# Altium PCB project4_v1.PcbDoc
Units mm, origin at the board's own origin, x right, y up, seen from the top; angles counter-clockwise.
Board outline 84.4 x 31.9 mm, 2 copper layers (Top Layer, Bottom Layer), stack 1.671 mm thick; 30 components, 30 nets, 99 pads, 9 vias.
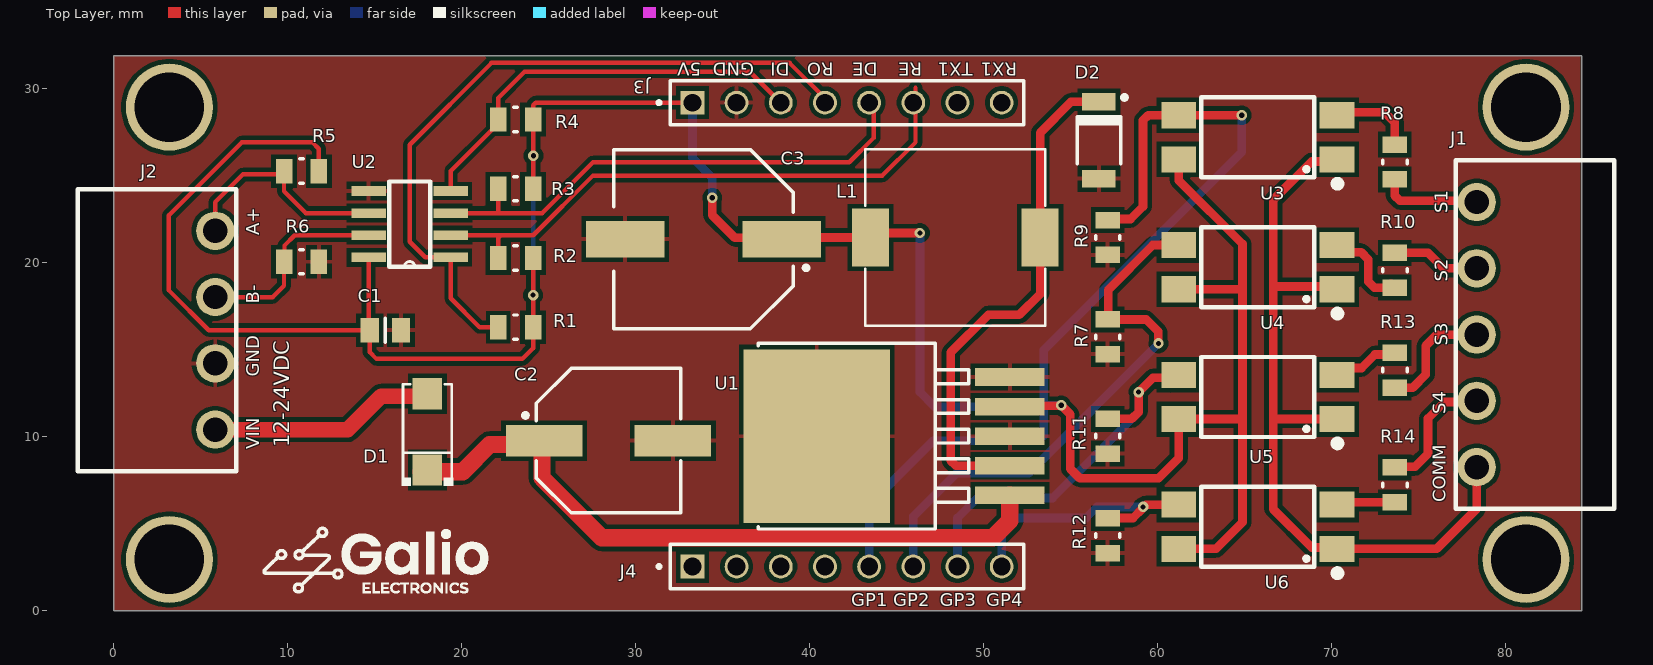
[diagram p0: Top Layer view]
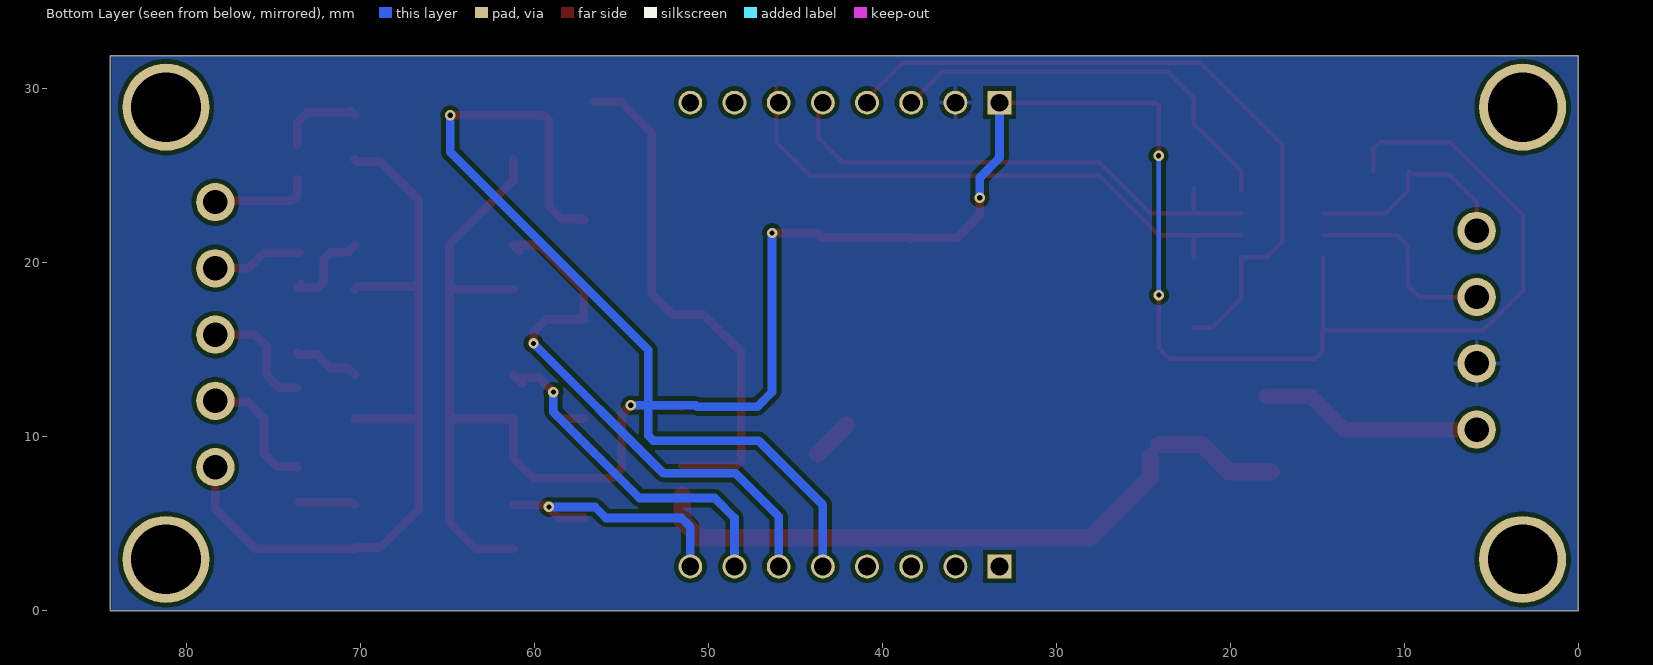
[diagram p1: Bottom Layer view, seen from below]
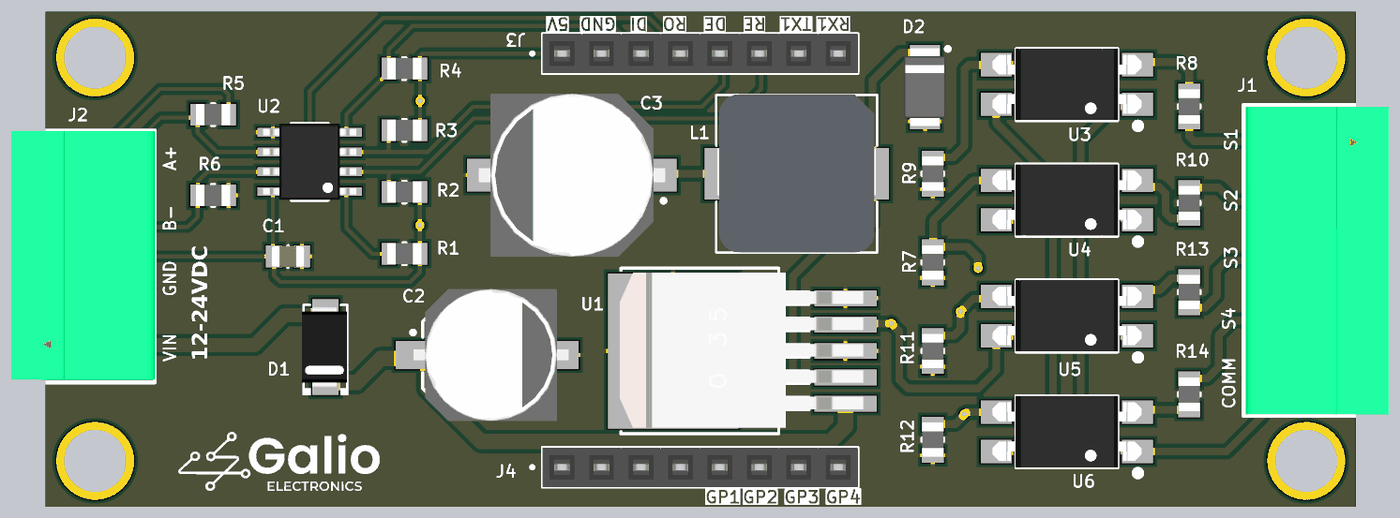
[diagram p2: 3D render of the assembled board from above, using the file's embedded part models]

## Layer stack, top to bottom
Top Solder: solder mask 0.0102, Solder Resist, Dk 3.5
Top Layer: signal copper 0.0356
Dielectric 1: dielectric 1.6, FR-4, Dk 4.8
Bottom Layer: signal copper 0.0356
Bottom Solder: solder mask 0.0102, Solder Resist, Dk 3.5

## Board outline
0,0 84.4,0 84.4,31.9 0,31.9

## Design rules (kind name [scope] priority, off if disabled: settings)
Clearance [All] p1: gap=0.254 ignorepadtopadclearanceinfootprint=FALSE
PolygonConnect [All] p1: connectstyle=Relief reliefconductorwidth=0.254 reliefentries=4 polygonreliefangle="90 Angle" airgapwidth=0.254
RoutingVias [All] p1: holewidth=0.711 width=1.27 viastyle="Through Hole" minholewidth=0.711 minwidth=1.27 maxholewidth=0.711 maxwidth=1.27
SolderMaskExpansion [All] p1: expansion=0.102 istentingtop=FALSE
Width Width_1 [InNet('VIN')] p1: maxlimit=1.2 minlimit=0.9 preferedwidth=1 minimp=50.000000 maximp=50.000000 favimp=50.000000
Width [All] p2: maxlimit=1 minlimit=0.254 preferedwidth=0.5 minimp=50.000000 maximp=50.000000 favimp=50.000000
30 further rules are at their usual default settings.

## Components (designator, comment, footprint, x,y, rotation, side; value= is the part's Value field where it differs from the comment)
C1 "100nF" CAPC2012X135N 15.621,16.129 r180 top
C2 "100uF" CAPAE830X1020N 28.448,9.779 r0 top
C3 "470uF" CAPAE1030X1020N 33.909,21.365 r180 top
D1 "1N4001" SMA_L4.5-W2.7-LS5.2-RD 18.034,10.287 r90 top
D2 "PMEG4020ETP,115" SODFL4725X110N 56.642,27.051 r270 top
J1 "TRT5" TRT_5_3.81_PLUG 78.366,15.875 r270 top
J2 "TRT4" TRT_4_3.81_PLUG 5.842,16.129 r90 top
J3 "PIN-HEADER-8" PIN-HEADER-8-FEMALE 42.164,29.21 r180 top
J4 "PIN-HEADER-8" PIN-HEADER-8-FEMALE 42.164,2.54 r180 top
L1 "CDRH104RNP-330NC" IND-SMD_L10.2-W10.0 48.387,21.463 r0 top
R1 "10k" RESC2012X60N 23.114,16.302 r0 top
R2 "10k" RESC2012X60N 23.114,20.281 r0 top
R3 "10k" RESC2012X60N 23.114,24.261 r0 top
R4 "10k" RESC2012X60N 23.114,28.24 r0 top
R5 "20k" RESC2012X60N 10.795,25.273 r0 top
R6 "20k" RESC2012X60N 10.795,20.066 r180 top
R7 "10k" RESC2012X60N 57.15,15.748 r90 top
R8 "4.7k" RESC2012X60N 73.66,25.797 r90 top value=10k
R9 "10k" RESC2012X60N 57.15,21.463 r90 top
R10 "4.7k" RESC2012X60N 73.66,19.574 r270 top value=10k
R11 "10k" RESC2012X60N 57.15,10.033 r90 top
R12 "10k" RESC2012X60N 57.15,4.318 r270 top
R13 "4.7k" RESC2012X60N 73.66,13.827 r90 top value=10k
R14 "4.7k" RESC2012X60N 73.66,7.239 r270 top value=10k
U1 "LM2575HVSX-5.0_NOPB" TO-263-5_L10.0-W8.4-P1.70-LS15.3-BR 45.974,10.033 r0 top
U2 "MAX485" SOIC8-N_MC 17.018,22.225 r180 top
U3 "PC814" PC814BS 65.786,27.216 r90 top
U4 "PC814" PC814BS 65.786,19.753 r90 top
U5 "PC814" PC814BS 65.786,12.289 r90 top
U6 "PC814" PC814BS 65.786,4.826 r90 top

## Footprints (in the part's own frame and the unit in brackets; to place one, negate y for a bottom-side part, rotate by r counter-clockwise, add the part's x,y. Pads: shape width x height; smd on the part's side, far side on the other; paste and mask are expansions set on the pad)
CAPAE830X1020N [mm] "Capacitor, Aluminium Electrolytric, 8.3mm L X 8.3mm W X 10.2mm H, IPC Medium Density"
  rect 4.4x1.8 smd: 1(-3.7,0) 2(3.7,0)
  silkscreen extent -4.9,-4.15 4.15,4.15, body extent -4.75,-4.25 5.25,4.25, height 10.2
CAPAE1030X1020N [mm] "Capacitor, Aluminium Electrolytric, 10.3mm L X 10.3mm W X 10.2mm H, IPC Medium Density"
  rect 4.5x2.1 smd: 1(-4.5,0) 2(4.5,0)
  silkscreen extent -6.03,-5.15 5.15,5.15, body extent -6,-5.25 6,5.25, height 10.2
CAPC2012X135N [mm] "Chip Capacitor, Body 2.0x1.25mm, IPC Medium Density"
  rect 1.05x1.4 smd: 1(-0.9,0) 2(0.9,0)
  silkscreen extent 0,-0.7 0,0.7, body extent -1.05,-0.67 1.05,0.68, height 1.25
IND-SMD_L10.2-W10.0 [mm]
  rect 2.124x3.32 smd: 1(4.878,0) 2(-4.878,0)
  silkscreen extent -5.18,-5.08 5.18,5.08, body extent -5.1,-5.08 5.1,5.12, height 4.8
PC814BS [mm]
  rect 1.5x2 smd: 1(-1.27,-4.55) 2(1.27,-4.55) 3(1.27,4.55) 4(-1.27,4.55)
  silkscreen extent -2.87,-4.77 2.3,3.25, body extent -2.29,-4.8 2.31,4.8, height 3.65
PIN-HEADER-8-FEMALE [mm]
  rect 1.37x1.37 hole 1.02: 1(8.89,0)
  round 1.37 hole 1.02: 2(6.35,0) 3(3.81,0) 4(1.27,0) 5(-1.27,0) 6(-3.81,0) 7(-6.35,0) 8(-8.89,0)
  silkscreen extent -10.16,-1.27 10.91,1.27, body extent -10.16,-1.27 10.16,1.27, height 8.5
RESC2012X60N [mm] "Chip Resistor, EIA 0805, Metric 2012, Body 2.0x1.2mm, IPC Medium Density"
  rect 0.95x1.4 smd: 1(-1,0) 2(1,0)
  silkscreen extent -0.1,-0.7 0.1,0.7, body extent -1.1,-0.67 1.1,0.68, height 0.6
SMA_L4.5-W2.7-LS5.2-RD [mm]
  rect 1.8x1.7 smd: 1(-2.193,0) 2(2.193,0)
  silkscreen extent -3.11,-1.48 2.73,1.48, body extent -2.64,-1.4 2.64,1.52, height 2.41
SODFL4725X110N [mm] "SOD128, SODFL Diode; 3.80mm W X 2.50mm L X 1.10mm H Body, IPC Medium Density"
  rect 1x1.93 smd: 1(-2.21,0) 2(2.21,0)
  silkscreen extent -2.58,-1.25 1.35,1.6, body extent -2.5,-1.35 2.5,1.35, height 1.1
SOIC8-N_MC [mil]
  rect 78x22 smd: 1(-93,75) 2(-93,25) 3(-93,-25) 4(-93,-75) 5(93,-75) 6(93,-25) 7(93,25) 8(93,75)
  silkscreen extent -46,-96 46,96, body extent -118,-97 118,96, height 69
TO-263-5_L10.0-W8.4-P1.70-LS15.3-BR [mm]
  rect 4x1.02 smd: 1(5.55,-3.4) 2(5.55,-1.7) 3(5.55,0) 4(5.55,1.7) 5(5.55,3.4)
  rect 8.4x10 smd: 6(-5.55,0)
  silkscreen extent -8.91,-5.33 3.2,5.33, body extent -8.98,-4.95 6.69,5.05, height 4.76
TRT_4_3.81_PLUG [mm] "Header,Male Pin,Covered(4 Sided)"
  round 2.2 hole 1.4: 1(-5.715,0) 2(-1.905,0) 3(1.905,0) 4(5.715,0)
  silkscreen extent -8.11,-1.2 8.11,7.9, body extent -7.96,-1.19 8.07,8.01, height 7.2
TRT_5_3.81_PLUG [mm] "Header,Male Pin,Covered(5 Sided)"
  round 2.2 hole 1.4: 1(-7.62,0) 2(-3.81,0) 3(0,0) 4(3.81,0) 5(7.62,0)
  silkscreen extent -10.02,-1.2 10.02,7.9, body extent -9.91,-1.07 9.93,8.13, height 7.2

## Part data
C1: library part CC0805_100NF_50V_10%_X7R, "Non-polarised capacitor", Case=0805, Manufacturer=GENERIC, Manufacturer1 ComponentHeight=1.35mm, Manufacturer1 Example=EPCOS, Manufacturer1 Part Number=B37941K5104K62, Tolerance=±10%, Voltage=50V, Author="CERN DEM JLC", Component Type=Standard, CreateDate=03/12/2007, HelpURL=\\cern.ch\dfs\Applications\Altium\Datasheets\CC0805_X7R_EPCOS.pdf, LatestRevisionDate=03/12/2007, Manufacturer Part Number=CC0805_100NF_50V_10%_X7R, Mounted=Yes, Part Description="SMD Multilayer Chip Ceramic Capacitor", Part Number=CC0805_100NF_50V_10%_X7R, Pin Count=2, SMD=Yes, Socket=No, Status=Preferred, Table="Capacitors SMD", TC=X7R
C2: library part CAE830-1020_100UF_35V_20%, "Polarised capacitor", Case=F, Manufacturer=GENERIC, Manufacturer1 ComponentHeight=10.2mm, Manufacturer1 Example=PANASONIC, Manufacturer1 Part Number=EEEFK1V101AP, Tolerance=±20%, Voltage=35V, Author="CERN DEM JLC", Component Type=Standard, CreateDate=3/12/2007, HelpURL=\\cern.ch\dfs\Applications\Altium\Datasheets\CAE_PANASONIC_FK.pdf, LatestRevisionDate=3/12/2007, Manufacturer Part Number=CAE830-1020_100UF_35V_20%, Mounted=Yes, Part Description="Aluminum Electrolytic SMT Capacitor", Part Number=CAE830-1020_100UF_35V_20%, Pin Count=2, SMD=Yes, Socket=No, Status="Not Recommended", Table="Capacitors SMD"
C3: library part CAE1030-1020_470UF_25V_20%, "Polarised capacitor", Case=G, Manufacturer=GENERIC, Manufacturer1 ComponentHeight=10.2mm, Manufacturer1 Example=PANASONIC, Manufacturer1 Part Number=EEEFK1E471AP, Tolerance=±20%, Voltage=25V, Author="CERN DEM JLC", Component Type=Standard, CreateDate=3/12/2007, HelpURL=\\cern.ch\dfs\Applications\Altium\Datasheets\CAE_PANASONIC_FK.pdf, LatestRevisionDate=3/12/2007, Manufacturer Part Number=CAE1030-1020_470UF_25V_20%, Mounted=Yes, Part Description="Aluminum Electrolytic SMT Capacitor", Part Number=CAE1030-1020_470UF_25V_20%, Pin Count=2, SMD=Yes, Socket=No, Status="Not Recommended", Table="Capacitors SMD"
D1: library part "1N4001 M1", Current - Rectified=1A, JLCPCB Part Class="Extended Part", LCSC Part Name="50V 1A", Manufacturer=JSMSEMI(杰盛微), Operating Junction Temperature Range=-55℃~+150℃, Reverse Leakage Current (Ir)=5uA@50V, Voltage - DC Reverse(Vr)=50V, Voltage - Forward(Vf@If)=1V@1A, Add into BOM=yes, Convert to PCB=yes, Datasheet=https://item.szlcsc.com/datasheet/1N4001%2520M1/22168790.html, Device="1N4001 M1", Diode Configuration=Independent, Manufacturer Part="1N4001 M1", Supplier=LCSC, Supplier Footprint=SMA, Supplier Part=C20754789, Symbol="1N4001 M1"
D2: "Diode Schottky 40V 2A Surface Mount SOD-128/CFP5", Package="CFP5-2 Nexperia USA Inc.", Check_prices=https://www.snapeda.com/parts/PMEG4020ETP,115/Nexperia/view-part/?ref=eda, MF="Nexperia USA", MP=PMEG4020ETP,115, SnapEDA_Link=https://www.snapeda.com/parts/PMEG4020ETP,115/Nexperia/view-part/?ref=snap
J1: library part TRT_5, "TRT_5"
J2: library part TRT_4, "TRT_4"
J3 J4: Package=None, Availability=Unavailable, MP=MTSW-108-07-G-S-208, Price=None
L1: "Power Inductors - SMD 33uH 2.2A,33 H Shielded Inductor 2.2 A 93mOhm Max Nonstandard", Manufacturer_Name=Sumida, Mouser Part Number=851-CDRH104RNP-330NC, Arrow Part Number=CDRH104RNP-330NC, Arrow Price/Stock=https://www.arrow.com/en/products/cdrh104rnp-330nc/sumida?region=nac, Datasheet Link=https://products.sumida.com/products/pdf/CDRH104R.pdf?t=1684247558, Geometry.Height=4mm, Manufacturer_Part_Number=CDRH104RNP-330NC, Mouser Price/Stock=https://www.mouser.co.uk/ProductDetail/Sumida/CDRH104RNP-330NC?qs=KlpbM3lUcZybZvlhH7RqIQ%3D%3D
R1 R2 R3 R4 R7 R8 R9 R10 R11 R12 R13 R14: library part R0805_10K_1%_0.125W_100PPM, "Resistor - 1%", Case=0805, Manufacturer=GENERIC, Manufacturer1 ComponentHeight=0.6mm, Manufacturer1 Example="NIC COMPONENT", Manufacturer1 Part Number=NRC10F1002TRF, Power=0.125W, Tolerance=±1%, Author="CERN DEM JLC", Component Type=Standard, CreateDate=03/12/2007, HelpURL=\\cern.ch\dfs\Applications\Altium\Datasheets\R0805_NIC_NRC.pdf, LatestRevisionDate=13/03/2008, Manufacturer Part Number=R0805_10K_1%_0.125W_100PPM, Mounted=Yes, Part Description="General Purpose Thick Film Chip Resistor", Part Number=R0805_10K_1%_0.125W_100PPM, Pin Count=2, SMD=Yes, Socket=No, Status=Preferred, Table="Resistors SMD", TC=±100ppm/°C
R5 R6: library part R0805_20K_1%_0.125W_100PPM, "Resistor - 1%", Case=0805, Manufacturer=GENERIC, Manufacturer1 ComponentHeight=0.6mm, Manufacturer1 Example="NIC COMPONENT", Manufacturer1 Part Number=NRC10F2002TRF, Power=0.125W, Tolerance=±1%, Author="CERN DEM JLC", Component Type=Standard, CreateDate=03/12/2007, HelpURL=\\cern.ch\dfs\Applications\Altium\Datasheets\R0805_NIC_NRC.pdf, LatestRevisionDate=13/03/2008, Manufacturer Part Number=R0805_20K_1%_0.125W_100PPM, Mounted=Yes, Part Description="General Purpose Thick Film Chip Resistor", Part Number=R0805_20K_1%_0.125W_100PPM, Pin Count=2, SMD=Yes, Socket=No, Status=Preferred, Table="Resistors SMD", TC=±100ppm/°C
U1: "Buck Switching Regulator IC Positive Fixed 5V 1 Output 2A TO-263-6, D2PAK (5 Leads + Tab), TO-263BA", Package=None, Check_prices=https://www.snapeda.com/parts/LM2575S-5.0/UMW/view-part/?ref=eda, MF=UMW, MP=LM2575S-5.0, SnapEDA_Link=https://www.snapeda.com/parts/LM2575S-5.0/UMW/view-part/?ref=snap
U3 U4 U5 U6: "Optoacoplador com saÃ­da de transistor de 5000Vrms, 1 canal, 4 componentes SMD.", Package="DIP-4 SHARP/Socle Technology", Check_prices=https://www.snapeda.com/parts/PC814/Essentra/view-part/?ref=eda, MF="Essentra Components", MP=PC814, SnapEDA_Link=https://www.snapeda.com/parts/PC814/Essentra/view-part/?ref=snap

## Free pads (board coordinates)
  round 5 hole 4: 1(3.2,2.95) 1(3.2,28.95) 1(81.2,2.95) 1(81.2,28.95)

## Via types
v1: diameter 0.6, hole 0.3, Top Layer to Bottom Layer, 9 vias

## Nets (pads, with @x,y where several pads share a name; then routed paths per layer and width w, separated by ;. In a path a pad name is that pad's centre, name@x,y a point inside that pad or via, vN(x,y) a via of type N, cw(c..) or ccw(c..) an arc to the next point about the centre after c; other vN are vias at no path point)
5V: C1.2 C3.1 J3.1 L1.2 R1.2 R2.2 R3.2 R4.2 R5.2 U1.4 U2.8 U3.4 U4.4 U5.4 U6.4 | length 158.4
  Top Layer w0.254: R5.2 11.795,26.559 11.43,26.924 7.366,26.924 3.175,22.733 3.175,18.415 5.461,16.129 C1.2 ; U2.8 14.656,16.194 C1.2 ; R2.2 v1(24.114,18.145) R1.2 24.114,15.097 23.495,14.478 15.113,14.478 14.721,14.87 C1.2 ; R3.2 24.13,24.277 v1(24.13,26.162) 24.13,28.194 24.114,28.21 R4.2 24.114,29.061 24.263,29.21 J3.1
  Top Layer w0.5: v1(34.417,23.749) 34.417,22.733 35.702,21.448 38.326,21.448 C3.1 38.507,21.463 L1.2 43.763,21.717 v1(46.355,21.717) ; U1.4 51.583,11.792 54.464,11.792 v1(54.483,11.811) 54.991,11.303 54.991,8.167 55.538,7.62 60.071,7.62 61.236,8.785 U5.4 64.897,11.019 ; U6.4 63.373,3.556 64.897,5.08 64.897,11.019 ; U4.4 64.897,18.483 ; U3.4 61.24,25.942 61.24,24.739 64.897,21.082 64.897,11.019
  Bottom Layer w0.254: v1(24.114,18.145) 24.122,18.153 24.122,26.154 v1(24.13,26.162)
  Bottom Layer w0.5: J3.1 33.274,26.035 34.417,24.892 v1(34.417,23.749) ; v1(46.355,21.717) 46.355,12.573 47.195,11.733 50.659,11.733 50.737,11.811 v1(54.483,11.811)
485_A: J2.4 R5.1 U2.6 | length 12.9
  Top Layer w0.254: J2.4 5.842,23.495 7.437,25.09 9.612,25.09 R5.1 9.795,24.114 11.049,22.86 U2.6
485_B: J2.3 R6.2 U2.7 | length 11.6
  Top Layer w0.254: J2.3 9.144,18.034 9.795,18.685 R6.2 9.822,20.093 9.822,20.998 10.414,21.59 U2.7
COMM: J1.5 U3.1 U4.1 U5.1 U6.1 | length 45.9
  Top Layer w0.5: U5.1 66.705,11.019 66.675,11.049 ; U4.1 70.179,18.639 66.832,18.639 66.675,18.796 ; U3.1 70.216,25.826 68.879,25.826 66.675,23.622 66.675,18.796 ; J1.5 78.366,5.855 76.067,3.556 U6.1 70.254,3.638 68.879,3.638 66.675,5.842 66.675,11.049 ; 66.675,11.049 66.675,18.796
DE: J3.5 R3.1 U2.3 | length 29.6
  Top Layer w0.254: U2.3 22.114,22.86 ; R3.1 22.114,22.86 ; J3.5 43.688,28.956 43.688,27.178 42.291,25.781 27.559,25.781 24.638,22.86 22.114,22.86
DI: J3.3 R4.1 U2.4 | length 24.7
  Top Layer w0.254: U2.4 19.38,25.281 22.114,28.015 22.114,29.48 23.622,30.988 36.576,30.988 J3.3 J3.3@38.772,28.792
GND: C1.1 C2.2 C3.2 D2.2 J2.2 J3.2 R6.1 R7.1 R9.1 R11.1 R12.2 U1.3 U1.5 U1.6 U2.5 | length 2.3
  Top Layer w1: U1.6@42.079,10.664 U1.6@43.726,9.017
GPIO_1: J4.5 R9.2 U3.3 | length 51.5
  Top Layer w0.5: R9.2 57.211,22.524 58.465,22.524 59.182,23.241 59.182,28.193 59.475,28.486 U3.3 v1(64.859,28.486)
  Bottom Layer w0.5: J4.5 43.434,6.096 47.117,9.779 53.174,9.779 53.467,10.072 53.467,14.986 64.859,26.378 v1(64.859,28.486)
GPIO_2: J4.6 R7.2 U4.3 | length 31.8
  Top Layer w0.5: v1(60.071,15.367) 60.052,15.386 60.052,16.056 59.36,16.748 R7.2 57.177,16.775 57.177,18.442 59.758,21.023 U4.3
  Bottom Layer w0.5: J4.6 45.974,5.422 48.46,7.908 52.612,7.908 v1(60.071,15.367)
GPIO_3: J4.7 R11.2 U5.3 | length 22.7
  Top Layer w0.5: R11.2 58.531,11.033 58.928,11.43 v1(58.928,12.573) 59.752,13.397 61.073,13.397 U5.3
  Bottom Layer w0.5: J4.7 48.514,5.334 49.657,6.477 53.975,6.477 58.928,11.43 v1(58.928,12.573)
GPIO_4: J4.8 R12.1 U6.3 | length 15.3
  Top Layer w0.5: R12.1 57.158,5.326 58.6,5.326 59.163,5.889 59.163,5.95 v1(59.182,5.969) 59.209,5.969 59.336,6.096 U6.3
  Bottom Layer w0.5: J4.8 51.054,4.826 51.562,5.334 55.903,5.334 56.538,5.969 v1(59.182,5.969)
NetC2_1: C2.1 D1.1 U1.1 | length 38.5
  Top Layer w1: D1.1@17.684,8.001 20.066,8.001 21.622,9.557 C2.1@24.12,9.557 ; C2.1@24.629,8.886 24.629,7.629 28.067,4.191 50.546,4.191 51.524,5.169 U1.1
NetD2_1: D2.1 L1.1 U1.2 | length 29.7
  Top Layer w0.5: U1.2 48.426,8.333 48.133,8.626 48.133,14.859 50.292,17.018 52.07,17.018 53.265,18.213 L1.1 53.265,27.484 55.042,29.261 D2.1
NetR8_2: R8.2 U3.2 | length 5
  Top Layer w0.5: U3.2 70.58,28.73 70.646,28.664 73.063,28.664 73.66,28.067 R8.2
NetR10_2: R10.2 U4.2 | length 5.4
  Top Layer w0.5: U4.2 70.756,20.603 71.726,20.603 72.136,20.193 72.136,18.923 72.485,18.574 R10.2 R10.2@73.435,18.799
NetR13_2: R13.2 U5.2 | length 3.8
  Top Layer w0.5: U5.2 70.737,13.961 71.746,13.961 72.518,14.733 73.566,14.733 R13.2
NetR14_2: R14.2 U6.2 | length 3.3
  Top Layer w0.5: U6.2 70.479,6.239 R14.2@73.533,6.239
RE: J3.6 R2.1 U2.2 | length 33.4
  Top Layer w0.254: U2.2 22.257,21.59 ; R2.1 22.114,21.447 22.257,21.59 ; 46.101,30.056 46.101,29.21 46.101,26.924 44.196,25.019 27.559,25.019 24.13,21.59 22.257,21.59
RO: J3.4 R1.1 U2.1 | length 41
  Top Layer w0.254: R1.1 21.036,16.302 19.38,17.958 U2.1 17.907,20.32 17.018,21.209 17.018,26.797 21.717,31.496 38.862,31.496 J3.4@41.028,29.33
RX1_232: J3.8
RX2_232: J4.2
SCL: J4.4
SDA: J4.3
Signal_1: J1.1 R8.1 | length 5.8
  Top Layer w0.5: R8.1 73.66,23.856 73.953,23.563 78.298,23.563 J1.1
Signal_2: J1.2 R10.1 | length 5.2
  Top Layer w0.5: R10.1@73.533,20.574 75.565,20.574 76.454,19.685 J1.2
Signal_3: J1.3 R13.1 | length 7.4
  Top Layer w0.5: R13.1 74.682,12.827 75.438,13.583 75.438,15.24 76.073,15.875 J1.3 J1.3@78.041,15.55
Signal_4: J1.4 R14.1 | length 7.5
  Top Layer w0.5: R14.1 73.69,8.269 74.817,8.269 75.565,9.017 75.565,11.049 76.516,12 78.301,12 J1.4
TX1_232: J3.7
TX2_232: J4.1
VIN: D1.2 J2.1 | length 12.9
  Top Layer w0.9: J2.1 13.462,10.414 15.389,12.341 D1.2@17.935,12.341
copper on no net: | length 1.2
  Top Layer w0.5: 60.736,13.059 61.236,13.559 ; 60.879,20.666 61.236,21.023

## Polygon pours and split planes (outlines as drawn)
GND on Top Layer "GND_L01_P000" (solid, pour order 0): 0,31.877 0,0 84.328,0 84.328,31.877
GND on Bottom Layer "GND_L02_P001" (solid, pour order 1): 0,0 0,31.877 84.328,31.877 84.328,0

## Silkscreen, mask and mechanical layers (free items; w line width, h text height)
Top Overlay:
  drawing of 2007 lines, arcs and shapes, not listed
  text "5V" at 33.782,31.496 h0.76 r180
  text "GND" at 36.83,31.496 h0.76 r180
  text "DI" at 38.862,31.496 h0.76 r180
  text "RO" at 41.402,31.496 h0.76 r180
  text "DE" at 43.942,31.496 h0.76 r180
  text "RE" at 46.482,31.496 h0.76 r180
  text "TX1" at 49.403,31.496 h0.76 r180
  text "RX1" at 51.943,31.496 h0.76 r180
  text "S1" at 76.708,22.86 h0.76 r90
  text "A+" at 8.382,21.59 h0.76 r90
  text "S2" at 76.708,18.923 h0.76 r90
  text "B-" at 8.382,17.653 h0.76 r90
  text "S3" at 76.708,15.24 h0.76 r90
  text "GND" at 8.382,13.462 h0.76 r90
  text "S4" at 76.581,11.303 h0.76 r90
  text "12-24VDC" at 10.414,9.398 h1.52 r90
  text "VIN" at 8.382,9.271 h0.76 r90
  text "COMM" at 76.581,6.223 h0.76 r90
  text "GP1" at 42.418,0.254 h0.76
  text "GP2" at 44.831,0.254 h0.76
  text "GP3" at 47.498,0.254 h0.76
  text "GP4" at 50.165,0.254 h0.76
Mechanical 1:
  lines w0.254: 0,0 84.328,0 84.328,31.877 0,31.877 0,0